# Altium PCB Thermostat_EEM_Fan_board.PCBDOC
Units mm, origin at the board's own origin, x right, y up, seen from the top; angles counter-clockwise.
Board outline 38 x 93 mm, 2 copper layers (TOP, BOT), stack 1.57 mm thick; 11 components, 0 nets, 18 pads, 0 vias.
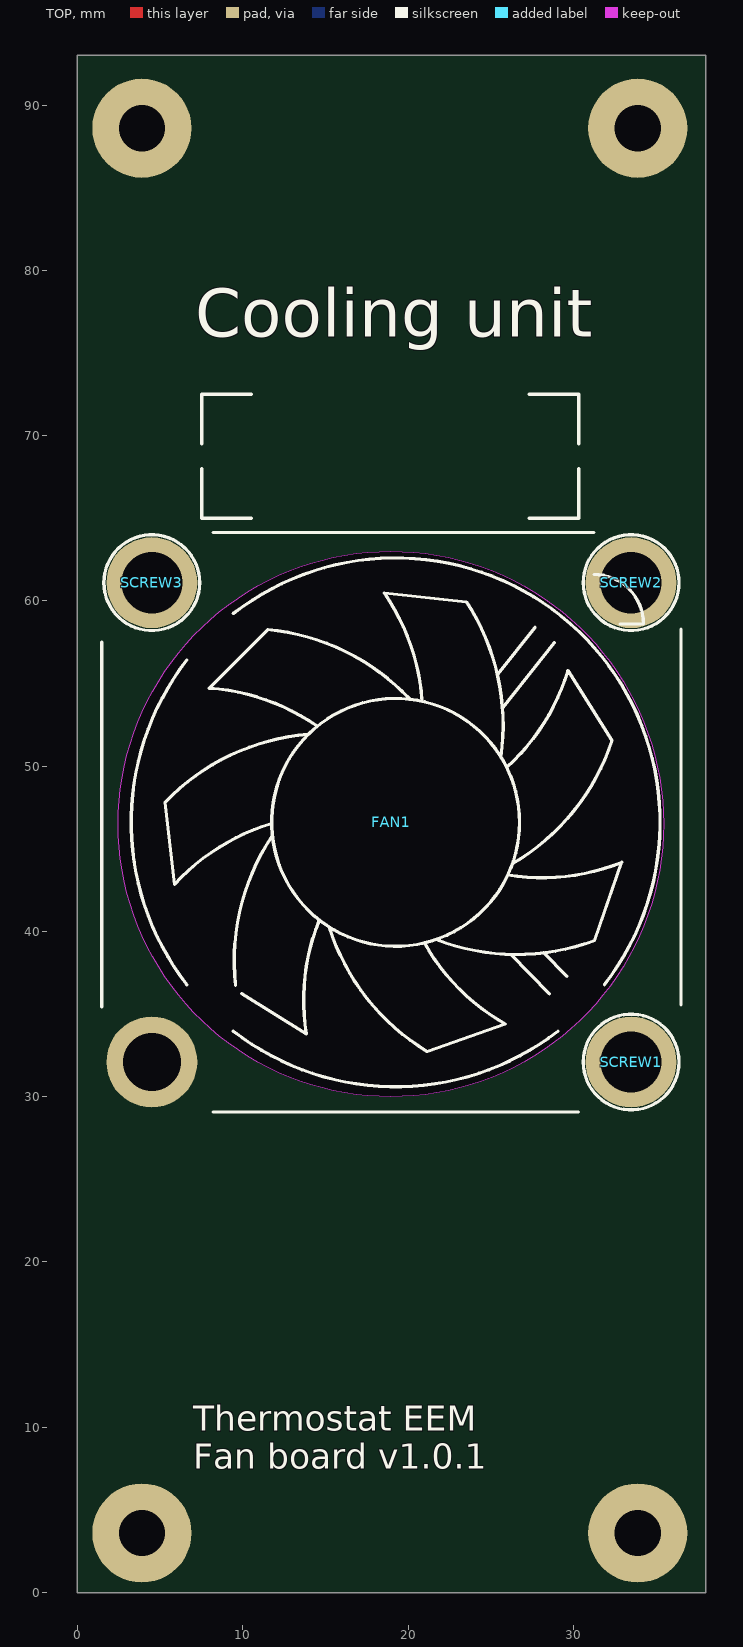
[diagram p0: TOP view]
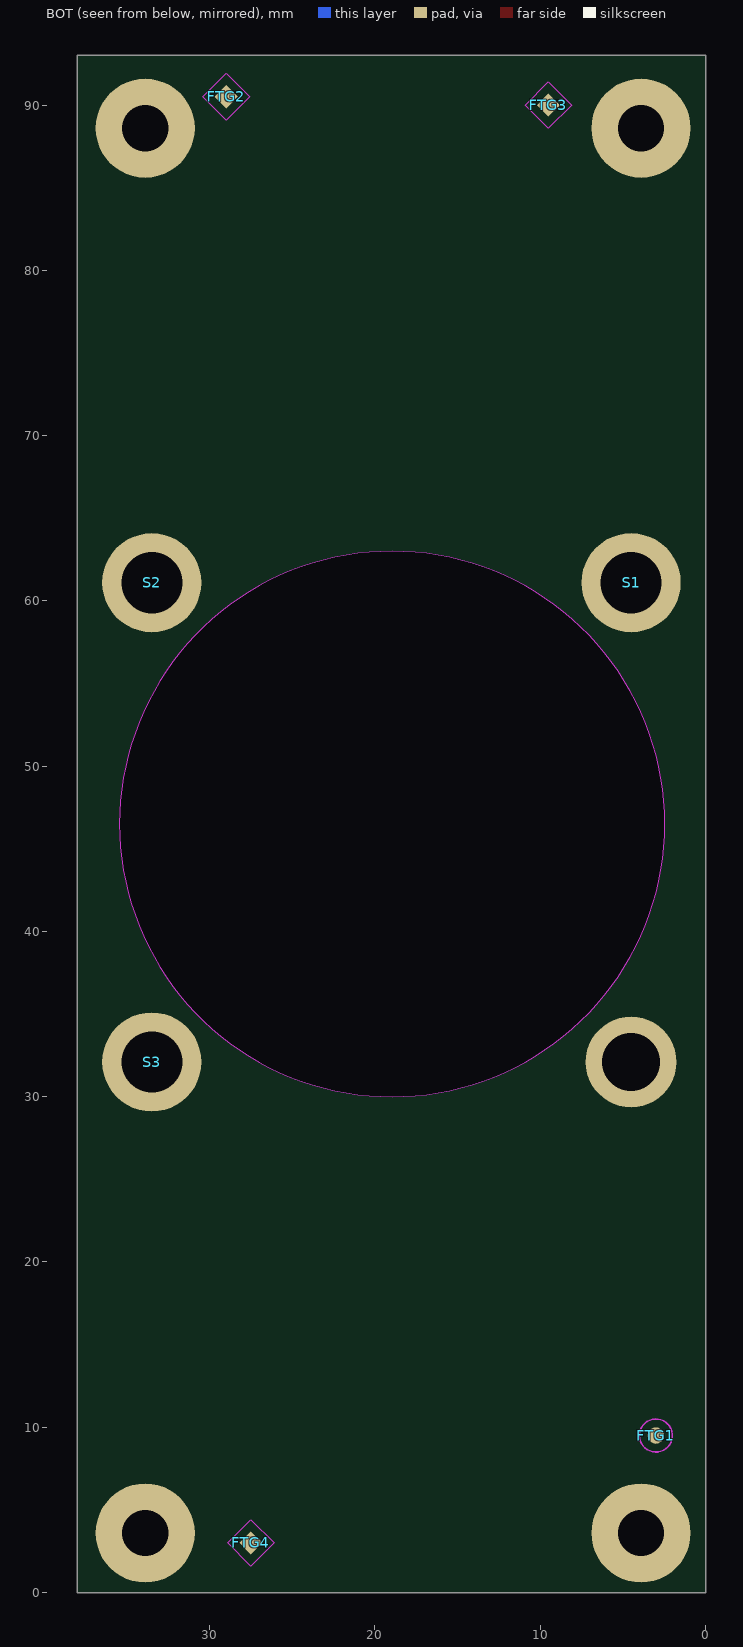
[diagram p1: BOT view, seen from below]

## Layer stack, top to bottom
TopSolder: solder mask 0.01, Solder Resist, Dk 3.5
TOP: signal copper 0.035
Dielectric2: core 1.5, Core-042, Dk 4.6
BOT: signal copper 0.035
BottomSolder: solder mask 0.01, Solder Resist, Dk 3.5

## Board outline
0,0 38,0 38,93 0,93
cut-out: 18.96,30 cw(c18.96,46.5) 2.46,46.5 cw(c18.96,46.5) 18.96,63 cw(c18.96,46.5) 35.46,46.5 cw(c18.96,46.5)

## Design rules (kind name [scope] priority, off if disabled: settings)
AcuteAngle [All] p1: minimum=6.00000000000000E+0001 checktracksonly=FALSE
Clearance Clearance_HV [InNetClass('HV') vs not InNetClass('HV')] p1: gap=1 ignorepadtopadclearanceinfootprint=FALSE
Clearance Clearance_balancing [InNamedPolygon('balancing')] p2: gap=1.27 ignorepadtopadclearanceinfootprint=FALSE except(0.635: Via-Via Via-Fill Via-Poly Via-Region Via-Text Via-Hole)
Clearance Clearance_DIFF [(InDifferentialPairClass('All Differential Pairs')and IsTrack ) vs (InDifferentialPairClass('All Differential Pairs') and IsTrack  )] p3 off: gap=0.508 ignorepadtopadclearanceinfootprint=FALSE except(0: Arc-Hole Track-Hole SMDPad-Hole THPad-Hole Via-Hole Fill-Hole Poly-Hole Region-Hole Text-Hole; 0.127: SMDPad-SMDPad SMDPad-THPad SMDPad-Via SMDPad-Fill SMDPad-Poly SMDPad-Region SMDPad-Text THPad-THPad THPad-Via THPad-Fill THPad-Poly THPad-Region THPad-Text Via-Via Via-Fill Via-Poly Via-Region Via-Text)
Clearance [All] p4: gap=0.127 ignorepadtopadclearanceinfootprint=FALSE except(0: Arc-Hole Track-Hole SMDPad-Hole THPad-Hole Via-Hole Fill-Hole Poly-Hole Region-Hole Text-Hole; 0.203: Arc-Poly Track-Poly SMDPad-Poly THPad-Poly Via-Poly Fill-Poly Poly-Poly)
ComponentClearance [All] p1: gap=0 collisioncheckmode=3 verticalgap=0 showdistances=FALSE
DiffPairsRouting [All] p1: maxlimit=0.152 minlimit=0.127 mostfreqgap=0.152 toplayer_minwidth=0.127 toplayer_maxwidth=0.152 toplayer_prefwidth=0.152 bottomlayer_minwidth=0.127 bottomlayer_maxwidth=0.152 bottomlayer_prefwidth=0.152 maxuncoupledlength=12.7
FabricationTestPointUsage TestPointUsage [All] p1: valid=0 allowmultiple=FALSE
FabricationTestpoint Testpoint [All] p1: side=3 testpointundercomponent=TRUE minsize=1.016 maxsize=2.54 preferedsize=1.524 minholesize=0.508 maxholesize=1.016 preferedholesize=0.813 testpointgrid=0.025 allowsidetop=TRUE allowsidebottom=TRUE usegrid=TRUE gridtolerance=0
Height [All] p1: minheight=0 maxheight=40 prefheight=40
HoleSize [All] p1: absolutevalues=TRUE maxlimit=3.81 minlimit=0.025 maxpercent=80.000 minpercent=20.000
HoleToHoleClearance [All] p1: gap=0.025 allowstackedmicrovias=TRUE
MinimumSolderMaskSliver [All] p1: minsoldermaskwidth=0
PlaneClearance PlaneClearance_HV [InNetClass('HV')] p1: clearance=1
PlaneClearance [All] p2: clearance=0.2
PlaneConnect [All] p1: pad.planeconnectstyle=Relief pad.reliefexpansion=0.254 pad.reliefentries=4 pad.reliefconductorwidth=0.254 pad.reliefairgap=0.152 via.planeconnectstyle=Direct via.reliefexpansion=0.508 via.reliefentries=4 via.reliefconductorwidth=0.254 via.reliefairgap=0.254
PolygonConnect PolygonConnect_pad [All] p1: thpad.connectstyle=Relief thpad.reliefconductorwidth=0.254 thpad.reliefentries=4 thpad.polygonreliefangle="90 Angle" thpad.airgapwidth=0.152 smdpad.connectstyle=Relief smdpad.reliefconductorwidth=0.254 smdpad.reliefentries=4 smdpad.polygonreliefangle="90 Angle" smdpad.airgapwidth=0.152 via.connectstyle=Direct via.reliefconductorwidth=0.254 via.reliefentries=4 via.polygonreliefangle="90 Angle" via.airgapwidth=0.152
RoomDefinition Thermostat_EEM_Fan_board [InComponentClass('Thermostat_EEM_Fan_board')] p1: confinementstyle=ConfineIn formatcopy=TRUE lockcomponents=FALSE outline 21.649,3 8,3 8,17 21.649,17
RoutingVias RoutingVias_HPOW [InNetClass('HPOW')] p1: holewidth=0.711 width=1.27 viastyle="Through Hole" minholewidth=0.711 minwidth=1.27 maxholewidth=0.711 maxwidth=1.27 useviatemplates=TRUE viatemplateguid#1={CC3703E4-4F4D-4ECC-8BAE-5075FE03B580} viatemplatename#1=v70h40m0mx0
RoutingVias [All] p2: holewidth=0.2 width=0.5 viastyle="Through Hole" minholewidth=0.2 minwidth=0.5 maxholewidth=1 maxwidth=2 useviatemplates=TRUE viatemplateguid#1={C4BC9E51-A50C-4827-9BB3-4603308538B4} viatemplateguid#2={09B06083-E995-414E-AB37-2F7DC4B9C6DF} viatemplateguid#3={CC3703E4-4F4D-4ECC-8BAE-5075FE03B580} viatemplatename#1=v50h20m0mx0 viatemplatename#2=v60h30m0mx0 viatemplatename#3=v70h40m0mx0
SilkToSilkClearance [All] p1: silktosilkclearance=0
SilkToSolderMaskClearance SilkscreenOverComponentPads [IsPad] p1: minsilkscreentomaskgap=0 clearancetoexposedcopper=TRUE
SolderMaskExpansion [All] p1: expansion=0.051 istentingtop=FALSE
ViasUnderSMD [All] p1: allowed=FALSE
Width Width_HPOW [InNetClass('HPOW')] p1: maxlimit=4 minlimit=0.254 preferedwidth=0.5
Width [All] p2: maxlimit=1.27 minlimit=0.127 preferedwidth=0.127
18 further rules are at their usual default settings.

## Components (designator, comment, footprint, x,y, rotation, side; value= is the part's Value field where it differs from the comment)
FAN1 "Fan No Pin" FAN_SUNON_MF35101V1-G99-A 19.25,46.6 r180 top
FTG1 "Use only in PCB" FIDUCIAL_TOP_C100-200 3,9.5 r270 bottom
FTG2 "Use only in PCB" FIDUCIAL_TOP_S100-200 29,90.5 r270 bottom
FTG3 "Use only in PCB" FIDUCIAL_TOP_S100-200 9.5,90 r270 bottom
FTG4 "Use only in PCB" FIDUCIAL_TOP_S100-200 27.5,3 r270 bottom
S1 "9774010151" 9774010151 4.5,61.1 r0 bottom
S2 "9774010151" 9774010151 33.5,61.1 r0 bottom
S3 "9774010151" 9774010151 33.5,32.1 r0 bottom
SCREW1 "M2.5x14" KRAFTBERG_M2.5X14/D7985-A2_v 33.5,32.1 r270 top
SCREW2 "M2.5x14" KRAFTBERG_M2.5X14/D7985-A2_v 33.5,61.1 r270 top
SCREW3 "M2.5x14" KRAFTBERG_M2.5X14/D7985-A2_v 4.5,61.1 r270 top

## Footprints (in the part's own frame and the unit in brackets; to place one, negate y for a bottom-side part, rotate by r counter-clockwise, add the part's x,y. Pads: shape width x height; smd on the part's side, far side on the other; paste and mask are expansions set on the pad)
9774010151 [mm] "SMD Steel Spacer with internal Thread"
  round 6 smd paste-2539.97: 1(0,0)
  round 0 hole 3.7 unplated: ""(0,0)
  body extent -2.55,-2.55 2.55,2.55, height 1
FAN_SUNON_MF35101V1-G99-A [mm] "12VDC, 8.0dB(A),  35x 35 x 10mm Axial Fan"
  round 5.5 hole 3.5: 1(-14.25,14.5) 1(-14.25,-14.5) 1(14.75,-14.5) 1(14.75,14.5)
  silkscreen extent -17.27,-17.54 17.78,17.53, body extent -17.35,-17.5 17.75,17.5, height 10
FIDUCIAL_TOP_C100-200 [mm] "Round Fiducial Target, Top Layer, 1.0mm, Top Solder 2.0mm, Keepout =2.0mm"
  round 1 smd paste-0.51 mask+0.5: FTG2(0,0)
  TOP keep-out circle w0.1: c0,0 r1
FIDUCIAL_TOP_S100-200 [mm] "Square Fiducial Target, Top Layer, 1.0mm, Top Solder 2.0mm, Keepout =2.0mm"
  rect 1x1 smd rot 45 paste-0.51 mask+0.5: 1(0,0)
  TOP keep-out region: 1.414,0 0,-1.414 -1.414,0 0,1.414
KRAFTBERG_M2.5X14/D7985-A2_v [mm] "M2.5 L=14mm Hexalobular Socket Pan Head Screw, Fully Threaded - Stainless Steel A2"
  silkscreen extent -2.9,-2.9 2.9,2.9, body extent -2.5,-2.5 2.5,2.5, height 12

## Part data
FAN1: "12VDC, 28.0dB(A),  35x 35 x 10mm Axial Fan with Tacho", Manufacturer=SUNON, Manufacturer Part Number=MF35101V1-1000U-G99, Part Number=FAN_SUNON_MF35101V1-1000U-G99, Author="CERN DEM JLC", Component Type=Standard, ComponentHeight=6.9mm, CreateDate=26.01.2015, HelpURL=\\cern.ch\dfs\Applications\Altium\Datasheets\SUNON_MC30060V1-000U-A99.pdf, LatestRevisionDate=26.01.2015, Mounted=Yes, PackageDescription="12VDC, 28.0dB(A),  35x 35 x 10mm Axial Fan", Part Description="5VDC, 9500RPM, 30 x 30 x 6mm Axial Fan with Tacho", Pin Count=0, PressFit=No, Sense=No, SMD=No, Socket=No, Status=None
FTG1: library part FIDUCIAL_TARGET_C100-200, "Fiducial Target", Author="CERN DEM JLC", Component Type="Standard (No BOM)", ComponentHeight=0mm, CreateDate=09.02.2010, Family=Fiducial, HelpURL=Undefined, LatestRevisionDate=04.04.2012, Mounted=No, PackageDescription="Round Fiducial Target, Top Layer, 1.0mm, Top Solder 2.0mm, Keepout =2.0mm", Part Description="Round Fiducial Target, Top Layer, 1.0mm, Top Solder 2.0mm, Keepout =2.0mm", Part Number=FIDUCIAL_TARGET_C100-200, Pin Count=1, Sense=No, SMD=Yes, Socket=No, Status=None
FTG2 FTG3 FTG4: library part FIDUCIAL_TARGET_S100-200, "Fiducial Target", Author="CERN DEM JLC", Component Type="Standard (No BOM)", ComponentHeight=0mm, CreateDate=09.02.2010, Family=Fiducial, HelpURL=Undefined, LatestRevisionDate=04.04.2012, Mounted=No, PackageDescription="Square Fiducial Target, Top Layer, 1.0mm, Top Solder 2.0mm, Keepout =2.0mm", Part Description="Square Fiducial Target, Top Layer, 1.0mm, Top Solder 2.0mm, Keepout =2.0mm", Part Number=FIDUCIAL_TARGET_S100-200, Pin Count=1, Sense=No, SMD=Yes, Socket=No, Status=None
S1 S2 S3: library part "WA-SMSI,  9774010151", "WA-SMSI SMD Steel Spacer with internal Thread", Manufacturer="Wurth Elektronik", ComponentLink1Description=Manufacturer, ComponentLink1URL=http://www.we-online.de, ComponentLink2Description=Datasheet, ComponentLink2URL=http://katalog.we-online.de/em/datasheet/9774010151.pdf, Created by="Baojun Chen", Created Date=20.Oct.2015, Manufacturer Part Number=9774010151
SCREW1 SCREW2 SCREW3: library part Screw_M2.5x14, "M2.5 L=14mm Hexalobular Socket Pan Head Screw, Fully Threaded, Stainless Steel A2", Manufacturer=Kraftberg, Manufacturer Part Number=M2.5X14/D7985-A2, Part Number=KRAFTBERG_M2.5X14/D7985-A2_v, Author=GK, Component Type=Mechanical, ComponentHeight=2.1mm, CreateDate=15.01.2013, HelpURL=\\cern.ch\dfs\Applications\Altium\Datasheets\BOSSARD_BN5687-3061601.pdf, LatestRevisionDate=15.01.2013, Mounted=Yes, PackageDescription="M2.5 L=14mm Hexalobular Socket Pan Head Screw, Fully Threaded - Stainless Steel A2", Part Description="M2.5 L=14mm Hexalobular Socket Pan Head Screw, Fully Threaded, Stainless Steel A2", Pin Count=0, PressFit=No, Sense=No, SMD=No, Socket=No, Status=None

## Free pads (board coordinates)
  round 6 hole 2.8: 0(33.9,3.6) 3(3.9,3.6)
  round 6 / inner round 4 / far side round 6 hole 2.8: 1(33.9,88.6) 2(3.9,88.6)

## Nets (pads, with @x,y where several pads share a name; then routed paths per layer and width w, separated by ;. In a path a pad name is that pad's centre, name@x,y a point inside that pad or via, vN(x,y) a via of type N, cw(c..) or ccw(c..) an arc to the next point about the centre after c; other vN are vias at no path point)
pads on no net: FAN1.1 FTG1.FTG2 FTG2.1 FTG3.1 FTG4.1 S1. S1.1 S2. S2.1 S3. S3.1

## Silkscreen, mask and mechanical layers (free items; w line width, h text height)
TopOverlay:
  lines w0.2: 7.521,68 7.521,65 10.521,65 ; 7.521,69.5 7.521,72.5 10.521,72.5 ; 27.339,65 30.339,65 30.339,68 ; 27.339,72.5 30.339,72.5 30.339,69.5
  text "Cooling unit" at 7.117,75 h5
  text "Thermostat EEM / Fan board v1.0.1" at 7,7.5 h1.52
Mechanical1:
  circle w0.254: c18.96,46.5 r16.5
  lines w0.01: 0,0 38,0 38,93 0,93 0,0